# EAGLE board ProMiniLoRaBreakout_2019-05-13 (EAGLE 9.2.0)
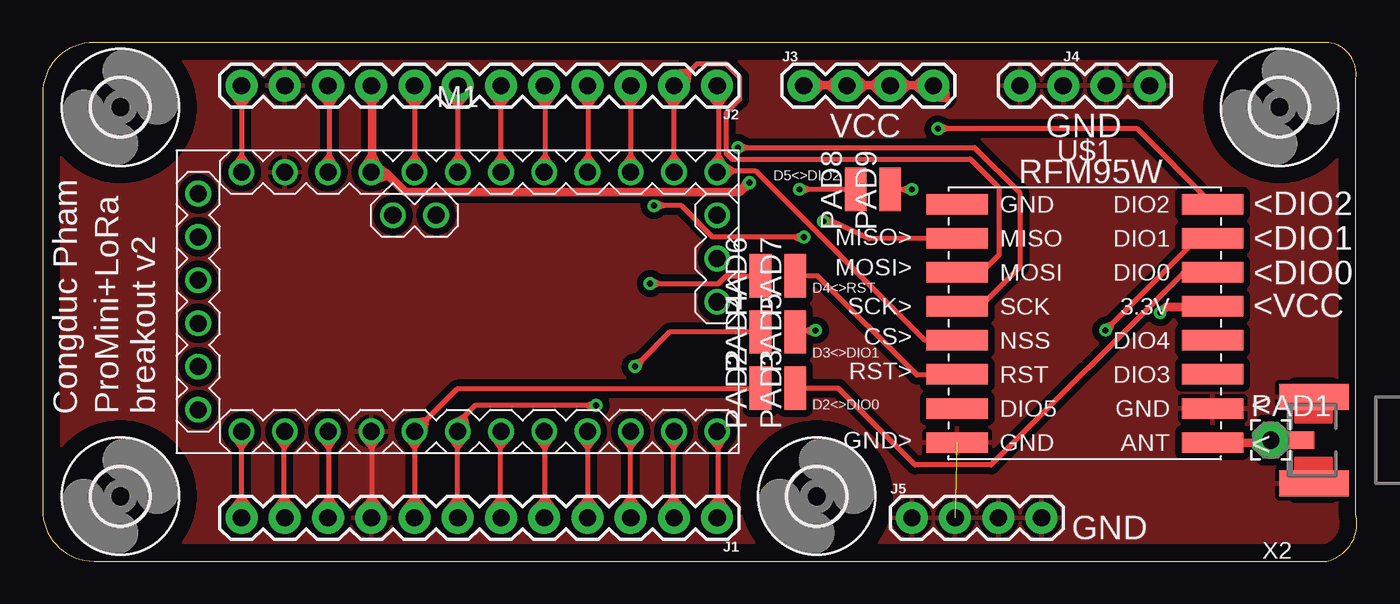
[diagram p0: board, top side]
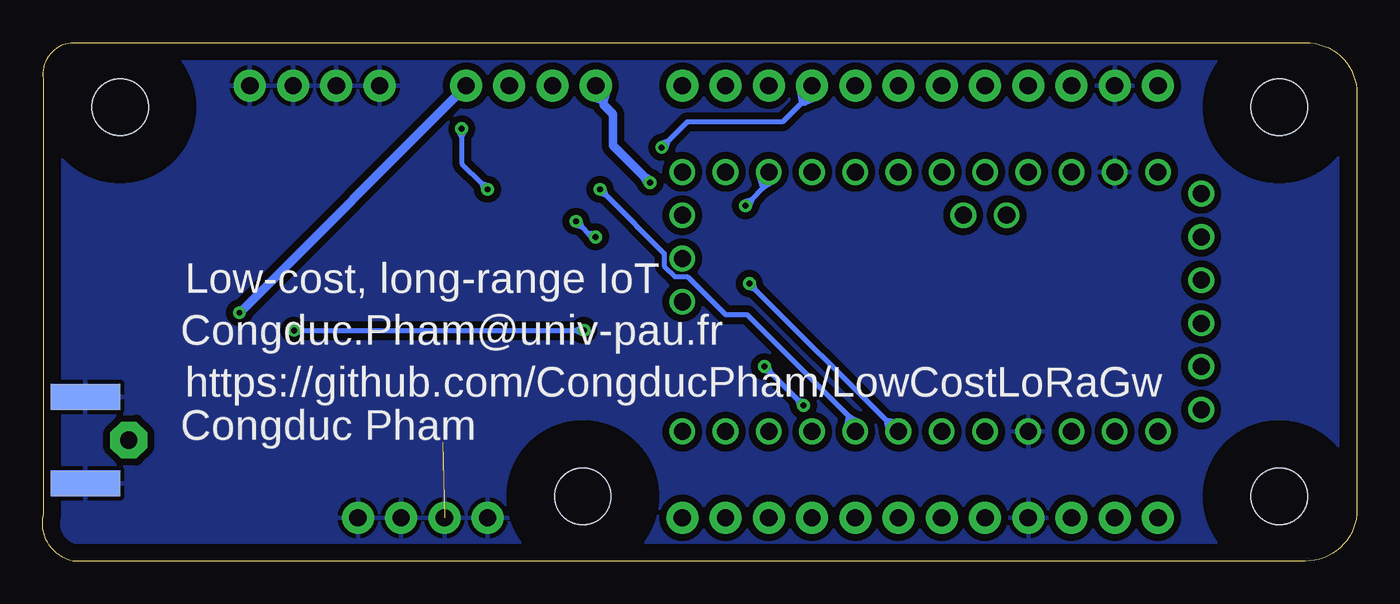
[diagram p1: board, bottom side, seen from below]

Size 77.2 x 30.47 mm. Coordinates in mm from the lower left corner, seen from the top.
Outline: 75.53,30.47 3.01,30.47 arc90 0,27.46 0,3.02 arc90 3.02,0 75.43,0 arc90 77.14,2.72 77.14,28.35 arc90 75.53,30.47
Copper layers (1*16): Top 0.035mm / dielectric 1.5mm / Bottom 0.035mm
Design rules "default": minimum track width 6mil, minimum drill 0.35mm, track to track 6mil, track to pad 6mil, pad to pad 6mil, via to via 6mil, smd to smd 6mil, copper to edge 40mil, drill to drill 6mil, minimum pad ring 10mil, minimum via ring 8mil, stop-mask expansion 4mil, vias tented up to drill 0mil, thermal gap 10mil
Net classes: 0 default: width 0.305 mm; 1 power: width 0.508 mm; 2 antenna: width 0.508 mm

## Footprints (pad centres in the part's own frame; a part is rotated, then mirrored left to right if it is on the bottom)
3,3 = hole 3.3: 0,0
1X12 = drill 1.016 pad 1.88: 1 0,0; 2 2.54,0; 3 5.08,0; 4 7.62,0; 5 10.16,0; 6 12.7,0; 7 15.24,0; 8 17.78,0; 9 20.32,0; 10 22.86,0; 11 25.4,0; 12 27.94,0
1X04 = drill 1.016 pad 1.88: 1 0,0; 2 2.54,0; 3 5.08,0; 4 7.62,0
ARDUINO-PRO-MINI = drill 1: J1.1 -15.24,6.35; J1.2 -15.24,3.81; J1.3 -15.24,1.27; J1.4 -15.24,-1.27; J1.5 -15.24,-3.81; J1.6 -15.24,-6.35; J2.1 -1.27,5.08; J2.2 -3.81,5.08; J3.1 15.24,0; J3.2 15.24,2.54; J3.3 15.24,5.08; J6.1 -12.7,7.62; J6.2 -10.16,7.62; J6.3 -7.62,7.62; J6.4 -5.08,7.62; J6.5 -2.54,7.62; J6.6 0,7.62; J6.7 2.54,7.62; J6.8 5.08,7.62; J6.9 7.62,7.62; J6.10 10.16,7.62; J6.11 12.7,7.62; J6.12 15.24,7.62; J7.1 15.24,-7.62; J7.2 12.7,-7.62; J7.3 10.16,-7.62; J7.4 7.62,-7.62; J7.5 5.08,-7.62; J7.6 2.54,-7.62; J7.7 0,-7.62; J7.8 -2.54,-7.62; J7.9 -5.08,-7.62; J7.10 -7.62,-7.62; J7.11 -10.16,-7.62; J7.12 -12.7,-7.62
2,15/1,0 = drill 1.016 pad 2.159 octagon: 1 0,0
SMD1,27-2,54 = smd 1.27 x 2.54: 1 0,0
WIRELESS-LORA-RFM95W#SMD = smd 3.6 x 1.2: A1 -7.5,7; A2 -7.5,5; A3 -7.5,3; A4 -7.5,1; A5 -7.5,-1; A6 -7.5,-3; A7 -7.5,-5; A8 -7.5,-7; B1 7.5,7; B2 7.5,5; B3 7.5,3; B4 7.5,1; B5 7.5,-1; B6 7.5,-3; B7 7.5,-5; B8 7.5,-7
SMA_EDGELAUNCH_UFL = smd 4.064 x 1.524: GND@1 2.032,-2.54; GND@2 2.032,2.54 | smd 4.064 x 1.524 bottom: GND@3 2.032,2.54; GND@4 2.032,-2.54 | smd 2.032 x 1.016: P 3.048,0

## Placement (x,y rotation side)
H1  MOUNT-HOLE3.3  [3,3]  4.57,26.67 0 top
H2  MOUNT-HOLE3.3  [3,3]  4.57,3.81 0 top
H3  MOUNT-HOLE3.3  [3,3]  72.64,26.67 0 top
H4  MOUNT-HOLE3.3  [3,3]  45.47,3.81 0 top
J1  [1X12]  39.62,2.54 180 top
J2  [1X12]  39.62,27.94 180 top
J3  [1X04]  44.7,27.94 0 top
J4  [1X04]  57.4,27.94 0 top
J5  [1X04]  51.05,2.54 0 top
M1  ARDUINO-PRO-MINI-3.3V  [ARDUINO-PRO-MINI]  24.38,15.24 0 top
PAD1  [2,15/1,0]  72.14,7.11 0 top
PAD2  [SMD1,27-2,54]  42.16,10.16 0 top
PAD3  [SMD1,27-2,54]  44.2,10.16 0 top
PAD4  [SMD1,27-2,54]  42.16,13.46 0 top
PAD5  [SMD1,27-2,54]  44.2,13.46 0 top
PAD6  [SMD1,27-2,54]  42.16,16.76 0 top
PAD7  [SMD1,27-2,54]  44.2,16.76 0 top
PAD8  [SMD1,27-2,54]  47.75,21.84 0 top
PAD9  [SMD1,27-2,54]  49.78,21.84 0 top
U$1  WIRELESS-LORA-RFM95W#SMD  [WIRELESS-LORA-RFM95W#SMD]  61.21,13.97 0 top
X2  [SMA_EDGELAUNCH_UFL]  76.71,7.11 180 top

## Library data of the parts
H1-H4 = holes
J1 J2 = SparkFun-Connectors
J3-J5 = SparkFun-Connectors; PROD_ID: CONN-09696
M1 U$1 = diy-modules
PAD1-PAD9 = wirepad
X2 = adafruit

## Nets
ANT [antenna]: PAD1.1 U$1.B8 X2.P
CS: J2.1 M1.J6.12 U$1.A5
D2: J1.8 M1.J7.8 PAD2.1
D3: J1.7 M1.J7.7 PAD4.1
D4: J1.6 M1.J7.6 PAD6.1
D5: J1.5 M1.J7.5 PAD8.1
DIO0: PAD3.1 U$1.B3
DIO1: PAD5.1 U$1.B2
DIO2: PAD9.1 U$1.B1
GND.1: U$1.A1
GND.2: J1.9 J2.11 J4.1 J4.2 J4.3 J4.4 J5.1 J5.2 J5.3 J5.4 M1.J6.2 M1.J7.9 U$1.A8 U$1.B7 X2.GND@1 X2.GND@2 X2.GND@3 X2.GND@4
MISO: J2.3 M1.J6.10 U$1.A2
MOSI: J2.2 M1.J6.11 U$1.A3
N$1: J1.1 M1.J7.1
N$2: J1.2 M1.J7.2
N$3: J1.3 M1.J7.3
N$4: J1.4 M1.J7.4
N$10: J1.10 M1.J7.10
N$11: J1.11 M1.J7.11
N$12: J1.12 M1.J7.12
N$13: J2.6 M1.J6.7
N$14: J2.7 M1.J6.6
N$15: J2.8 M1.J6.5
N$17: J2.5 M1.J6.8
N$18: J2.10 M1.J6.3
N$20: J2.12 M1.J6.1
RST: PAD7.1 U$1.A6
SCK: J2.4 M1.J6.9 U$1.A4
VCC [power]: J2.9 J3.1 J3.2 J3.3 J3.4 M1.J6.4 U$1.B4

## Tracks (layer width: path | path; a pad name or v marks a point on that pad's centre or on a via)
ANT
  Top 0.508: 72.37,6.93 73.5,6.93 73.64,7.05 X2.P | 72.37,6.93 68.72,6.93 U$1.B8 | 72.37,6.93 PAD1.1
CS
  Top 0.305: 39.69,23.86 39.69,26.93 39.69,27.85 J2.1 | 39.69,23.86 39.69,22.94 M1.J6.12 | 40.62,22.94 39.8,22.94 M1.J6.12 | 40.62,22.94 41.86,22.94 51.8,12.99 53.63,12.99 U$1.A5 | 39.69,23.86 39.17,23.25 M1.J6.12 | 39.69,23.86 40.13,23.19 M1.J6.12 | 40.62,22.94 39.95,23.37 M1.J6.12 | 40.62,22.94 40.02,22.41 M1.J6.12
  Top 0.61: 39.69,26.93 40.14,27.58 J2.1 39.15,27.51 39.69,26.93
D2
  Top 0.305: PAD2.1 42.11,10.11 24.35,10.11 22.56,8.32 | 22.56,8.32 21.86,7.62 M1.J7.8 | 22.56,8.32 | 21.86,6.62 21.86,7.51 M1.J7.8 | 21.86,6.62 21.86,3.56 21.86,2.59 J1.8 | 22.56,8.32 21.77,8.22 | M1.J7.8 21.77,8.22 | 22.56,8.32 22.44,7.53 | 22.44,7.53 | 22.56,8.32 21.77,8.22 | M1.J7.8 21.77,8.22 | 22.56,8.32 22.44,7.53 | M1.J7.8 22.44,7.53 | 22.56,8.32 21.77,8.22 | M1.J7.8 21.77,8.22 | 22.56,8.32 22.44,7.53 | M1.J7.8 22.44,7.53 | 21.86,6.62 22.33,7.26 M1.J7.8 | 21.86,6.62 21.37,7.25 M1.J7.8
  Top 0.61: 21.86,3.56 21.35,2.94 J1.8 22.35,2.93 21.86,3.56
D3  (via drill 0.35)
  Top 0.305: 24.37,6.62 24.37,3.56 24.37,2.59 J1.7 | 24.37,6.62 24.37,7.62 M1.J7.7 | 42.2,12.57 42.2,13.45 PAD4.1 | 24.94,7.28 M1.J7.7 | 42.32,12.53 PAD4.1 | 42.32,12.42 PAD4.1 | PAD4.1 36.83,13.46 35.17,11.8 | 35.17,11.8 v34.8,11.43 | v32.51,9.14 31.99,9.14 | 31.99,9.14 25.4,9.14 24.79,8.53 | 24.79,8.53 24.38,8.13 M1.J7.7 | 35.17,11.8 34.72,11.64 v34.8,11.43 | 35.17,11.8 35.01,11.35 v34.8,11.43 | 31.99,9.14 | 31.99,9.14 | 31.99,9.14 32.41,9.35 | 31.99,9.14 32.41,8.94 | 32.41,8.94 | v32.51,9.14 32.41,8.94 | 31.99,9.14 32.41,9.35 | v32.51,9.14 32.41,9.35 | 31.99,9.14 32.41,8.94 | v32.51,9.14 32.41,8.94 | 31.99,9.14 32.41,9.35 | v32.51,9.14 32.41,9.35 | 24.37,6.62 24.86,7.25 M1.J7.7 | 24.37,6.62 23.9,7.26 M1.J7.7 | 24.79,8.53 24.09,8.15 M1.J7.7 | 24.79,8.53 24.97,7.76 M1.J7.7
  Top 0.61: 24.37,3.56 23.88,2.93 J1.7 24.88,2.94 24.37,3.56
  Bottom 0.305: v34.8,11.43 34.43,11.06 | 34.43,11.06 32.88,9.52 | 32.88,9.52 v32.51,9.14 | 34.43,11.06 34.87,11.22 v34.8,11.43 | 34.43,11.06 34.59,11.5 v34.8,11.43 | 32.88,9.52 32.44,9.36 v32.51,9.14 | 32.88,9.52 32.72,9.07 v32.51,9.14
D4  (via drill 0.35)
  Top 0.305: 26.89,6.62 26.89,3.55 26.89,2.59 J1.6 | 26.89,6.62 26.89,7.62 M1.J7.6 | PAD6.1 40.14,16.76 39.69,16.31 36.21,16.31 | v35.69,16.31 36.21,16.31 | 36.21,16.31 35.78,16.51 | 35.78,16.51 | v35.69,16.31 35.78,16.51 | 36.21,16.31 35.78,16.1 | v35.69,16.31 35.78,16.1 | 36.21,16.31 35.78,16.51 | v35.69,16.31 35.78,16.51 | 36.21,16.31 35.78,16.1 | v35.69,16.31 35.78,16.1 | 26.89,6.62 27.39,7.24 M1.J7.6 | 26.89,6.62 26.43,7.28 M1.J7.6
  Top 0.61: 26.89,3.55 26.41,2.92 J1.6 27.4,2.95 26.89,3.55
  Bottom 0.305: 27.67,8.29 27,7.62 M1.J7.6 | 27.67,8.29 35.32,15.94 | 35.32,15.94 v35.69,16.31 | 35.32,15.94 35.76,16.09 v35.69,16.31 | 35.32,15.94 35.47,16.38 v35.69,16.31 | 27.67,8.29 26.87,8.22 M1.J7.6 | 27.67,8.29 27.51,7.5 M1.J7.6
D5  (via drill 0.35)
  Top 0.305: 29.52,6.62 29.52,3.55 29.52,2.59 J1.5 | 29.52,6.62 29.52,7.62 M1.J7.5 | PAD8.1 44.97,21.84 | 44.97,21.84 v44.45,21.84 | 44.97,21.84 44.55,22.05 | 44.55,22.05 | v44.45,21.84 44.55,22.05 | 44.97,21.84 44.55,21.64 | v44.45,21.84 44.55,21.64 | 44.97,21.84 44.55,22.05 | v44.45,21.84 44.55,22.05 | 44.97,21.84 44.55,21.64 | v44.45,21.84 44.55,21.64 | 29.52,6.62 29.96,7.28 M1.J7.5 | 29.52,6.62 29,7.23 M1.J7.5
  Top 0.61: 29.52,3.55 28.99,2.96 J1.5 29.98,2.91 29.52,3.55
  Bottom 0.305: v44.45,21.84 44.08,21.47 | 44.08,21.47 40.68,18.08 40.68,17.34 40.06,16.72 39.33,16.72 37.08,14.48 35.81,14.48 29.87,8.53 | 29.87,8.53 29.46,8.13 M1.J7.5 | 44.08,21.47 44.52,21.63 v44.45,21.84 | 44.08,21.47 44.24,21.92 v44.45,21.84 | 29.87,8.53 29.17,8.15 M1.J7.5 | 29.87,8.53 30.05,7.76 M1.J7.5
DIO0
  Top 0.305: PAD3.1 46.74,10.16 51.24,5.65 55.7,5.65 66.93,16.88 68.61,16.88 U$1.B3
DIO1  (via drill 0.35)
  Top 0.305: v45.4,13.56 44.88,13.56 | 44.88,13.56 44.26,13.56 PAD5.1 | 62.8,13.94 67.81,18.94 68.61,18.94 U$1.B2 | 62.8,13.94 v62.43,13.56 | 44.88,13.56 | 44.88,13.56 | 44.88,13.56 45.3,13.77 | 44.88,13.56 45.3,13.36 | 45.3,13.36 | v45.4,13.56 45.3,13.36 | 44.88,13.56 45.3,13.77 | v45.4,13.56 45.3,13.77 | 44.88,13.56 45.3,13.36 | v45.4,13.56 45.3,13.36 | 44.88,13.56 45.3,13.77 | v45.4,13.56 45.3,13.77 | 62.8,13.94 62.36,13.78 v62.43,13.56 | 62.8,13.94 62.65,13.49 v62.43,13.56
  Bottom 0.305: v62.43,13.56 61.91,13.56 | 61.91,13.56 45.93,13.56 | 45.93,13.56 v45.4,13.56 | 45.93,13.56 45.5,13.77 | 45.5,13.77 | v45.4,13.56 45.5,13.77 | 45.93,13.56 45.5,13.36 | v45.4,13.56 45.5,13.36 | 45.93,13.56 45.5,13.77 | v45.4,13.56 45.5,13.77 | 45.93,13.56 45.5,13.36 | v45.4,13.56 45.5,13.36 | 61.91,13.56 | 61.91,13.56 | 61.91,13.56 62.34,13.77 | 61.91,13.56 62.34,13.36 | 62.34,13.36 | v62.43,13.56 62.34,13.36 | 61.91,13.56 62.34,13.77 | v62.43,13.56 62.34,13.77 | 61.91,13.56 62.34,13.36 | v62.43,13.56 62.34,13.36 | 61.91,13.56 62.34,13.77 | v62.43,13.56 62.34,13.77
DIO2  (via drill 0.35)
  Top 0.305: U$1.B1 64.28,25.4 53.1,25.4 | 53.1,25.4 v52.58,25.4 | v51.05,21.84 50.53,21.84 | 50.53,21.84 PAD9.1 | 53.1,25.4 52.67,25.6 | 52.67,25.6 | v52.58,25.4 52.67,25.6 | 53.1,25.4 52.67,25.2 | v52.58,25.4 52.67,25.2 | 53.1,25.4 52.67,25.6 | v52.58,25.4 52.67,25.6 | 53.1,25.4 52.67,25.2 | v52.58,25.4 52.67,25.2 | 50.53,21.84 | 50.53,21.84 | 50.53,21.84 50.96,22.05 | 50.53,21.84 50.96,21.64 | 50.96,21.64 | v51.05,21.84 50.96,21.64 | 50.53,21.84 50.96,22.05 | v51.05,21.84 50.96,22.05 | 50.53,21.84 50.96,21.64 | v51.05,21.84 50.96,21.64 | 50.53,21.84 50.96,22.05 | v51.05,21.84 50.96,22.05
  Bottom 0.305: v52.58,25.4 52.58,24.88 | 52.58,24.88 52.58,23.37 51.42,22.22 | 51.42,22.22 v51.05,21.84 | 52.58,24.88 52.78,25.3 | 52.78,25.3 | v52.58,25.4 52.78,25.3 | 52.58,24.88 52.37,25.3 | v52.58,25.4 52.37,25.3 | 52.58,24.88 52.78,25.3 | v52.58,25.4 52.78,25.3 | 52.58,24.88 52.37,25.3 | v52.58,25.4 52.37,25.3 | 51.42,22.22 50.98,22.06 v51.05,21.84 | 51.42,22.22 51.27,21.77 v51.05,21.84
GND.2  (1 unrouted)
  Top 0.305: 68.72,8.99 U$1.B7 | 19.34,6.62 19.34,3.55 19.34,2.59 J1.9 | 19.34,6.62 19.34,7.62 M1.J7.9 | 19.34,6.62 19.8,7.28 M1.J7.9 | 19.34,6.62 18.84,7.24 M1.J7.9 | U$1.A8 53.63,7.05
  Top 0.61: 19.34,3.55 18.82,2.95 J1.9 19.81,2.92 19.34,3.55
  pour Top (isolate 0.406): 0.25,30.73 0.25,-0.25 77.22,-0.25 77.22,30.73
  pour Bottom (isolate 0.406): 0.51,30.73 0.51,-0.25 77.22,-0.25 77.22,30.73
MISO  (via drill 0.35)
  Top 0.305: J2.3 34.54,26.92 34.54,23.86 | 34.54,23.86 | 34.54,23.86 M1.J6.10 | 46.38,19.96 v45.86,19.96 | U$1.A2 53.63,19.05 53.53,18.95 48.52,18.95 46.38,19.96 | 36.44,20.88 37.52,20.88 39.34,19.05 44.19,19.05 | 36.44,20.88 | 36.44,20.88 v35.92,20.88 | v44.72,19.05 44.19,19.05 | 44.19,19.05 | 44.19,19.05 44.62,18.85 | 44.19,19.05 44.62,19.25 | 44.62,19.25 | v44.72,19.05 44.62,19.25 | 46.38,19.96 | 46.38,19.96 45.96,20.17 | 45.96,20.17 | v45.86,19.96 45.96,20.17 | 46.38,19.96 45.96,19.76 | 45.96,19.76 | 36.44,20.88 36.01,21.08 | 36.01,21.08 | v35.92,20.88 36.01,21.08 | 36.44,20.88 36.01,20.67 | 36.01,20.67 | 44.19,19.05 | 44.19,19.05 44.62,18.85 | 44.62,18.85 | 44.19,19.05 | 44.19,19.05 44.62,18.85 | 44.62,18.85 | v44.72,19.05 44.62,18.85 | 44.19,19.05 44.62,19.25 | 44.19,19.05 44.62,18.85 | v44.72,19.05 44.62,18.85 | 44.19,19.05 44.62,19.25 | 44.62,19.25 | v44.72,19.05 44.62,19.25 | 44.19,19.05 44.62,18.85 | v44.72,19.05 44.62,18.85 | 44.19,19.05 44.62,19.25 | v44.72,19.05 44.62,19.25 | 46.38,19.96 45.96,20.17 | 45.96,20.17 | 46.38,19.96 45.96,20.17 | v45.86,19.96 45.96,20.17 | 46.38,19.96 | 45.96,19.76 | v45.86,19.96 45.96,19.76 | 46.38,19.96 45.96,20.17 | 46.38,19.96 | 46.38,19.96 45.96,19.76 | v45.86,19.96 45.96,19.76 | 46.38,19.96 45.96,20.17 | v45.86,19.96 45.96,20.17 | 46.38,19.96 45.96,19.76 | v45.86,19.96 45.96,19.76 | 36.44,20.88 36.01,21.08 | 36.01,21.08 | 36.44,20.88 36.01,21.08 | v35.92,20.88 36.01,21.08 | 36.44,20.88 | 36.01,20.67 | v35.92,20.88 36.01,20.67 | 36.44,20.88 36.01,21.08 | 36.44,20.88 | 36.44,20.88 36.01,20.67 | v35.92,20.88 36.01,20.67 | 36.44,20.88 36.01,21.08 | v35.92,20.88 36.01,21.08 | 36.44,20.88 36.01,20.67 | v35.92,20.88 36.01,20.67 | 34.54,23.86 | 34.54,23.86 34.06,23.22
  Top 0.305: 34.06,23.22 | 34.54,23.86 35.02,23.22 | 35.02,23.22 | 34.54,23.86 34.06,23.22 | 34.06,23.22 | M1.J6.10 34.06,23.22 | 34.54,23.86 35.02,23.22 | M1.J6.10 35.02,23.22 | 34.54,23.86 34.06,23.22 | M1.J6.10 34.06,23.22 | 34.54,23.86 35.02,23.22 | M1.J6.10 35.02,23.22
  Top 0.61: 34.54,26.92 35.04,27.54 J2.3 34.05,27.54 34.54,26.92
  Bottom 0.305: v44.72,19.05 44.95,19.05 45.18,19.29 | v45.86,19.96 45.49,19.59 | 45.49,19.59 45.18,19.29 | M1.J6.10 34.54,22.25 34.88,21.92 | v35.92,20.88 35.54,21.25 | 35.54,21.25 34.88,21.92 | 45.18,19.29 44.71,19.28 v44.72,19.05 | 45.18,19.29 44.9,18.91 v44.72,19.05 | 45.49,19.59 45.93,19.75 v45.86,19.96 | 45.49,19.59 45.65,20.04 v45.86,19.96 | 35.54,21.25 35.7,20.8 v35.92,20.88 | 35.54,21.25 35.99,21.09 v35.92,20.88 | 34.88,21.92 | 34.88,21.92 35.12,22.68 | 35.12,22.68 | M1.J6.10 35.12,22.68 | 34.88,21.92 34.21,22.36 | 34.88,21.92 35.12,22.68 | M1.J6.10 35.12,22.68 | 34.88,21.92 34.21,22.36 | M1.J6.10 34.21,22.36
MOSI
  Top 0.305: 37.06,23.86 37.06,26.92 37.06,27.85 J2.2 37.17,27.97 37.83,28.63 38.43,29.22 40.14,29.22 40.95,28.42 40.95,27.14 40.14,26.34 40.14,23.97 40.49,23.62 54.48,23.62 56.17,21.93 56.17,18 55.17,16.99 53.75,16.99 U$1.A3 | 37.06,23.86 37.06,22.94 M1.J6.11 | 37.06,23.86 36.59,23.21 M1.J6.11 | 37.06,23.86 37.55,23.23 M1.J6.11
  Top 0.61: J2.2 37.57,27.53 37.06,26.92 36.58,27.56 J2.2 | J2.2 37.04,28.57 37.83,28.63 37.71,27.84 J2.2
N$1
  Top 0.305: 39.69,6.62 39.69,3.55 39.69,2.59 J1.1 | 39.69,6.62 39.69,7.62 M1.J7.1 | 39.69,6.62 40.13,7.29 M1.J7.1 | 39.69,6.62 39.17,7.23 M1.J7.1
  Top 0.61: 39.69,3.55 39.15,2.97 J1.1 40.14,2.91 39.69,3.55
N$2
  Top 0.305: 37.06,6.62 37.06,3.56 37.06,2.59 J1.2 | 37.06,6.62 37.06,7.62 M1.J7.2 | 37.06,6.62 37.55,7.25 M1.J7.2 | 37.06,6.62 36.59,7.27 M1.J7.2
  Top 0.61: 37.06,3.56 36.58,2.92 J1.2 37.57,2.95 37.06,3.56
N$3
  Top 0.305: J1.3 34.54,3.56 34.54,6.62 | 34.54,6.62 | 34.54,6.62 M1.J7.3 | 34.54,6.62 35.02,7.26 | 35.02,7.26 | 34.54,6.62 | 34.54,6.62 34.06,7.26 | 34.06,7.26 | 34.54,6.62 35.02,7.26 | 35.02,7.26 | M1.J7.3 35.02,7.26 | 34.54,6.62 34.06,7.26 | M1.J7.3 34.06,7.26 | 34.54,6.62 35.02,7.26 | M1.J7.3 35.02,7.26 | 34.54,6.62 34.06,7.26 | M1.J7.3 34.06,7.26
  Top 0.61: 34.54,3.56 34.05,2.94 J1.3 35.04,2.94 34.54,3.56
N$4
  Top 0.305: 32.03,6.62 32.03,3.56 32.03,2.59 J1.4 | 32.03,6.62 32.03,7.62 M1.J7.4 | 32.03,6.62 32.49,7.27 M1.J7.4 | 32.03,6.62 31.53,7.25 M1.J7.4
  Top 0.61: 32.03,3.56 31.52,2.95 J1.4 32.51,2.92 32.03,3.56
N$10
  Top 0.305: 16.83,6.62 16.83,3.55 16.83,2.59 J1.10 | 16.83,6.62 16.83,7.62 M1.J7.10 | 16.83,6.62 17.27,7.29 M1.J7.10 | 16.83,6.62 16.31,7.23 M1.J7.10
  Top 0.61: 16.83,3.55 16.29,2.97 J1.10 17.28,2.91 16.83,3.55
N$11
  Top 0.305: 14.2,6.62 14.2,3.56 14.2,2.59 J1.11 | 14.2,6.62 14.2,7.62 M1.J7.11 | 14.2,6.62 14.7,7.25 M1.J7.11 | 14.2,6.62 13.73,7.27 M1.J7.11
  Top 0.61: 14.2,3.56 13.72,2.92 J1.11 14.71,2.95 14.2,3.56
N$12
  Top 0.305: J1.12 11.68,3.56 11.68,6.62 | 11.68,6.62 | 11.68,6.62 M1.J7.12 | 11.68,6.62 12.16,7.26 | 12.16,7.26 | 11.68,6.62 | 11.68,6.62 11.2,7.26 | 11.2,7.26 | 11.68,6.62 12.16,7.26 | 12.16,7.26 | M1.J7.12 12.16,7.26 | 11.68,6.62 11.2,7.26 | M1.J7.12 11.2,7.26 | 11.68,6.62 12.16,7.26 | M1.J7.12 12.16,7.26 | 11.68,6.62 11.2,7.26 | M1.J7.12 11.2,7.26
  Top 0.61: 11.68,3.56 11.19,2.94 J1.12 12.18,2.94 11.68,3.56
N$13
  Top 0.305: 26.89,23.86 26.89,26.92 26.89,27.85 J2.6 | 26.89,23.86 26.89,22.94 M1.J6.7 | 26.89,23.86 26.43,23.2 M1.J6.7 | 26.89,23.86 27.39,23.24 M1.J6.7
  Top 0.61: 26.89,26.92 27.4,27.53 J2.6 26.41,27.56 26.89,26.92
N$14
  Top 0.305: 24.37,23.86 24.37,26.92 24.37,27.85 J2.7 | 24.37,23.86 24.37,22.94 M1.J6.6 | 24.37,23.86 23.9,23.22 M1.J6.6 | 24.37,23.86 24.86,23.23 M1.J6.6
  Top 0.61: 24.37,26.92 24.88,27.54 J2.7 23.88,27.55 24.37,26.92
N$15
  Top 0.305: 21.86,23.86 21.86,26.92 21.86,27.85 J2.8 | 21.86,23.86 21.86,22.94 M1.J6.5 | 21.86,23.86 21.37,23.23 M1.J6.5 | 21.86,23.86 22.33,23.22 M1.J6.5
  Top 0.61: 21.86,26.92 22.35,27.55 J2.8 21.35,27.54 21.86,26.92
N$17
  Top 0.305: 29.52,23.86 29.52,26.92 29.52,27.85 J2.5 | 29.52,23.86 29.52,22.94 M1.J6.8 | 29.52,23.86 29,23.25 M1.J6.8 | 29.52,23.86 29.96,23.2 M1.J6.8
  Top 0.61: 29.52,26.92 29.98,27.57 J2.5 28.99,27.52 29.52,26.92
N$18
  Top 0.305: 16.83,23.86 16.83,26.93 16.83,27.85 J2.10 | 16.83,23.86 16.83,22.94 M1.J6.3 | 16.83,23.86 16.31,23.25 M1.J6.3 | 16.83,23.86 17.27,23.19 M1.J6.3
  Top 0.61: 16.83,26.93 17.28,27.58 J2.10 16.29,27.51 16.83,26.93
N$20
  Top 0.305: J2.12 11.68,26.92 11.68,23.86 | 11.68,23.86 | 11.68,23.86 M1.J6.1 | 11.68,23.86 | 11.68,23.86 11.2,23.22 | 11.2,23.22 | 11.68,23.86 12.16,23.22 | 12.16,23.22 | 11.68,23.86 11.2,23.22 | 11.2,23.22 | M1.J6.1 11.2,23.22 | 11.68,23.86 12.16,23.22 | M1.J6.1 12.16,23.22 | 11.68,23.86 11.2,23.22 | M1.J6.1 11.2,23.22 | 11.68,23.86 12.16,23.22 | M1.J6.1 12.16,23.22
  Top 0.61: 11.68,26.92 12.18,27.54 J2.12 11.19,27.54 11.68,26.92
RST
  Top 0.305: PAD7.1 45.52,16.76 51.35,10.94 53.63,10.94 U$1.A6
SCK  (via drill 0.35)
  Top 0.305: 32.03,23.86 32.03,26.92 32.03,27.85 J2.4 | 32.03,23.86 32.03,22.94 M1.J6.9 | v40.83,24.31 41.36,24.31 | 41.36,24.31 | 41.36,24.31 54.74,24.31 57.39,21.65 57.39,17.27 55.17,15.05 53.75,15.05 U$1.A4 | 41.36,24.31 40.93,24.51 | 40.93,24.51 | v40.83,24.31 40.93,24.51 | 41.36,24.31 40.93,24.1 | 40.93,24.1 | 41.36,24.31 40.93,24.51 | 40.93,24.51 | 41.36,24.31 40.93,24.51 | v40.83,24.31 40.93,24.51 | 41.36,24.31 | 40.93,24.1 | v40.83,24.31 40.93,24.1 | 41.36,24.31 40.93,24.51 | 41.36,24.31 | 41.36,24.31 40.93,24.1 | v40.83,24.31 40.93,24.1 | 41.36,24.31 40.93,24.51 | v40.83,24.31 40.93,24.51 | 41.36,24.31 40.93,24.1 | v40.83,24.31 40.93,24.1 | 32.03,23.86 31.53,23.23 M1.J6.9 | 32.03,23.86 32.49,23.21 M1.J6.9
  Top 0.61: 32.03,26.92 32.51,27.56 J2.4 31.52,27.53 32.03,26.92
  Bottom 0.305: 40.46,24.68 39.34,25.79 33.74,25.79 32.49,27.05 32.03,27.51 32.03,27.85 J2.4 | 40.46,24.68 v40.83,24.31 | 40.46,24.68 40.62,24.23 v40.83,24.31 | 40.46,24.68 40.91,24.52 v40.83,24.31
  Bottom 0.61: 32.49,27.05 32.63,27.83 J2.4 31.76,27.35 32.49,27.05
VCC  (via drill 0.35)
  Top 0.508: 19.34,26.92 19.34,27.85 J2.9 | 19.34,26.92 19.34,23.86 | 19.34,23.86 19.34,22.94 M1.J6.4 | 46.23,27.97 47.23,27.97 J3.2 | 46.23,27.97 45.72,27.97 | 45.72,27.97 44.72,27.97 J3.1 | 53.02,27.2 52.38,27.85 J3.4 | 51.31,27.97 52.15,27.97 J3.4 | 51.31,27.97 50.8,27.97 | 50.8,27.97 49.86,27.97 J3.3 | 48.77,27.97 49.52,27.97 J3.3 | 48.77,27.97 48.26,27.97 | 48.26,27.97 47.46,27.97 J3.2 | 20.29,22.68 21.29,21.68 40.95,21.68 41.14,21.88 | 20.29,22.68 20.14,22.82 19.57,22.82 M1.J6.4 | v41.52,22.25 41.14,21.88 | 41.14,21.88 41.58,22.14 v41.52,22.25 | 41.14,21.88 41.41,22.31 v41.52,22.25 | 53.02,27.2 53.01,27.95 J3.4 | 53.02,27.2 52.27,27.26 J3.4 | 51.31,27.97 51.85,27.45 J3.4 | 51.31,27.97 51.87,28.46 J3.4 | 45.72,27.97 45.15,28.46 J3.1 | 45.72,27.97 45.18,27.45 J3.1 | 19.34,23.86 18.88,23.13 M1.J6.4 | 19.34,23.86 19.75,23.09 M1.J6.4 | 20.29,22.68 19.63,23.24 M1.J6.4 | 20.29,22.68 19.47,22.39 M1.J6.4 | 19.34,26.92 19.83,27.5 J2.9 | 19.34,26.92 18.82,27.46 J2.9 | 46.23,27.97 46.77,27.45 J3.2 | 46.23,27.97 46.79,28.46 J3.2 | 48.26,27.97 47.69,28.46 J3.2 | 48.26,27.97 47.72,27.45 J3.2 | 50.8,27.97 50.23,28.46 J3.3 | 50.8,27.97 50.26,27.45 J3.3 | 48.77,27.97 49.31,27.45 J3.3 | 48.77,27.97 49.33,28.46 J3.3 | v65.63,14.59 65.98,14.94 68.49,14.94 U$1.B4
  Bottom 0.508: 41.89,22.62 43.69,24.42 43.69,26.25 44.26,26.82 44.26,27.03 | 41.89,22.62 v41.52,22.25 | 44.26,27.03 44.26,27.28 44.6,27.62 44.6,27.85 J3.1 | 41.89,22.62 41.45,22.36 v41.52,22.25 | 41.89,22.62 41.62,22.19 v41.52,22.25 | 44.26,27.03 44.96,27.3 J3.1 | 44.26,27.03 44.05,27.75 J3.1 | v65.63,14.59 52.38,27.85 J3.4

## Text on the board
tPlace: VCC | GND | RFM95W | D5<>DIO2 | <DIO2 | MISO> | <DIO1 | MOSI> | <DIO0 | D4<>RST | SCK> | <VCC | CS> | D3<>DIO1 | RST> | < | Congduc Pham | ProMini+LoRa / breakout v2 | D2<>DIO0 | GND> | < | GND
bPlace: Low-cost, long-range IoT | Congduc.Pham@univ-pau.fr | https://github.com/CongducPham/LowCostLoRaGw | Congduc Pham